# Altium PCB main.PcbDoc (part 1 of 2)
Units mm, origin at the board's own origin, x right, y up, seen from the top; angles counter-clockwise.
Board outline 39.94 x 40 mm, 2 copper layers (Top Layer, Bottom Layer), stack 1.571 mm thick; 56 components, 40 nets, 199 pads, 485 vias.
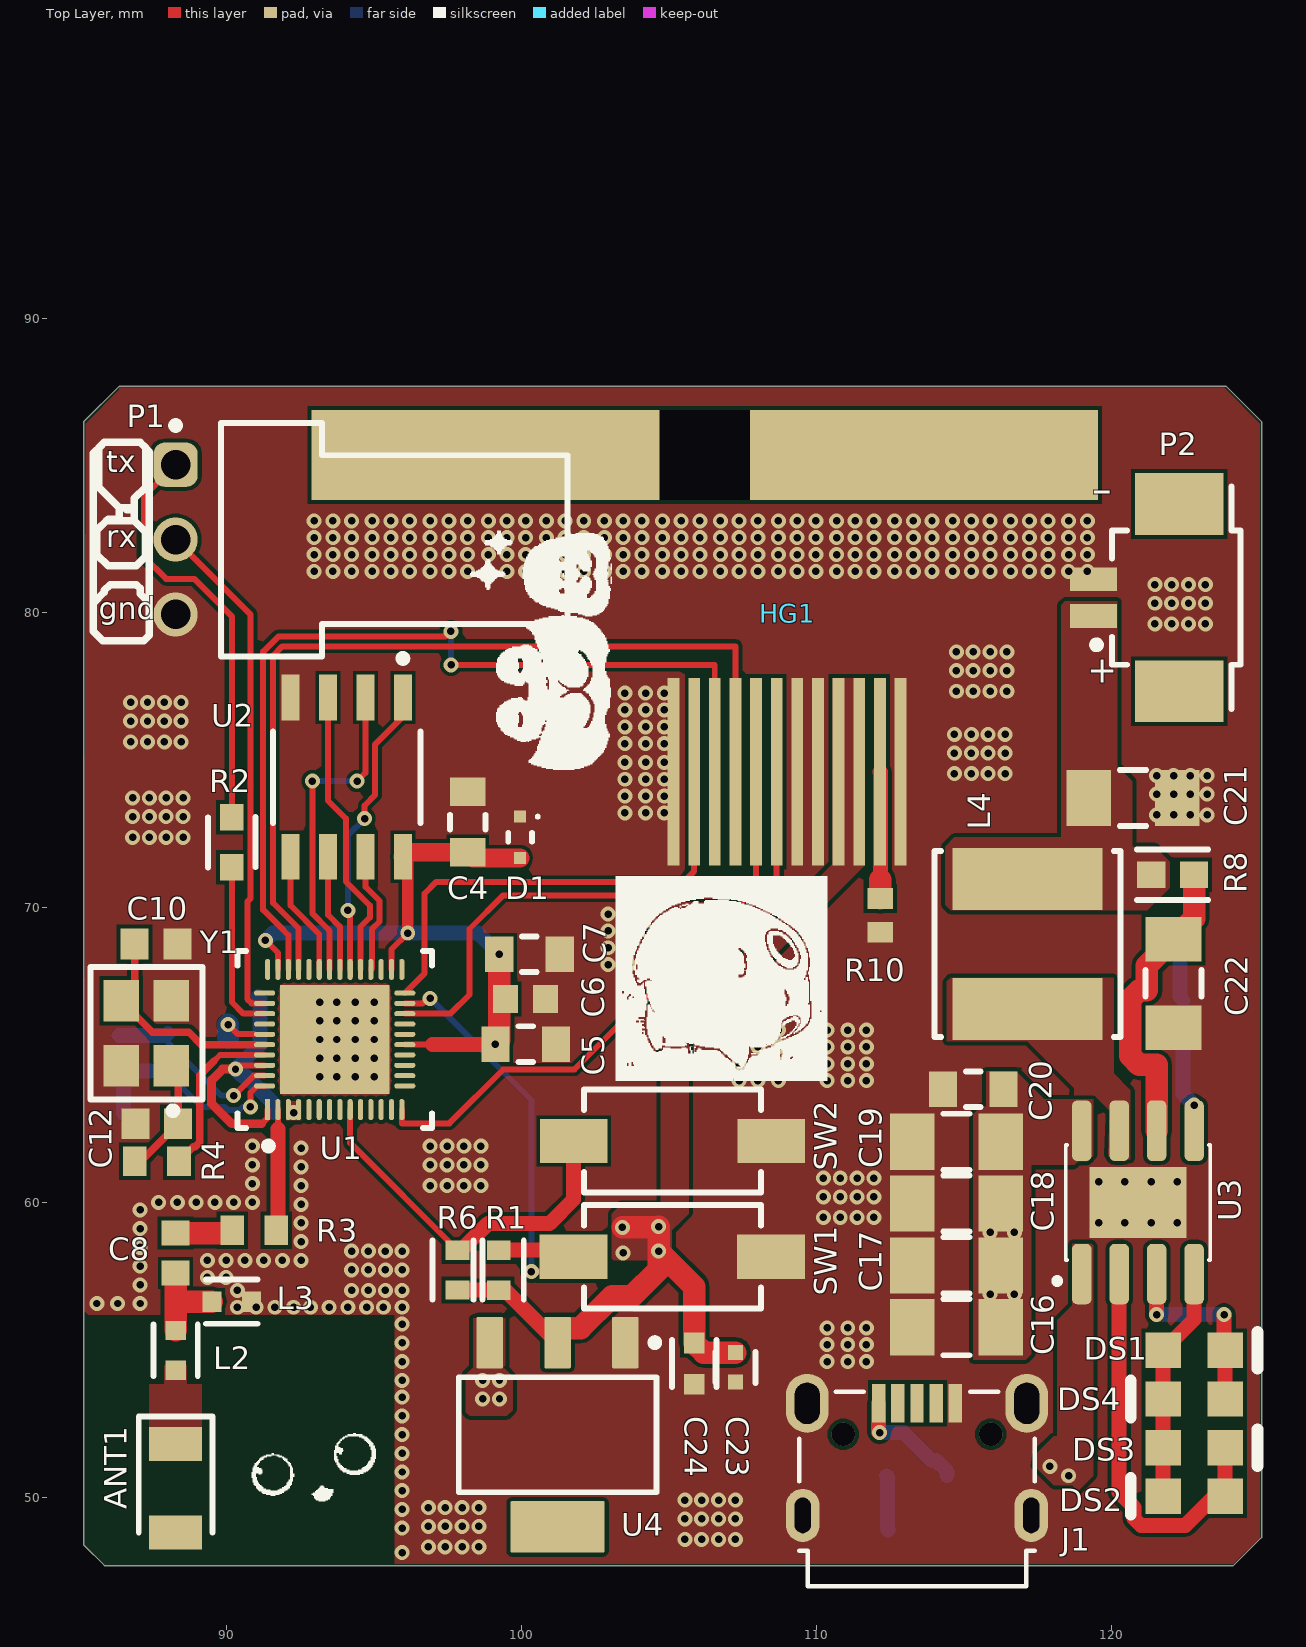
[diagram p0: Top Layer view]
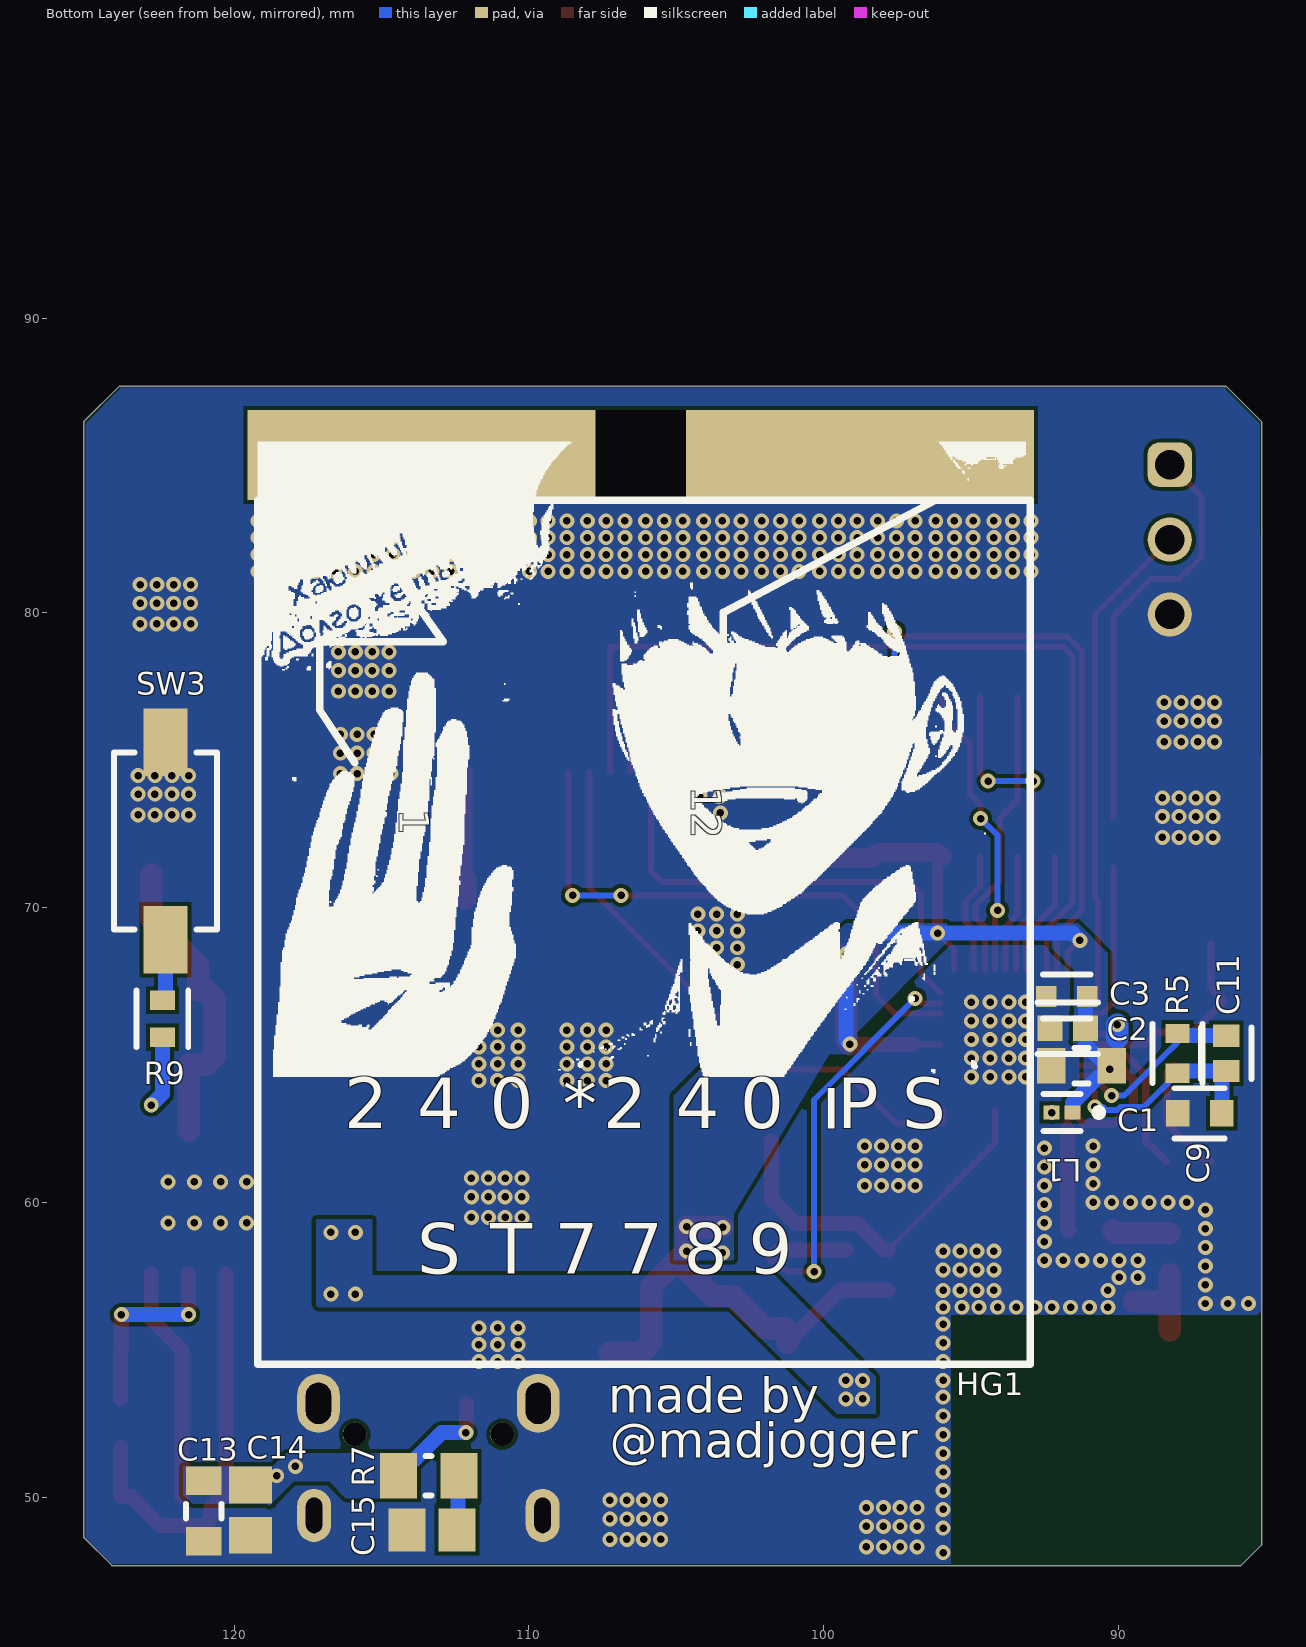
[diagram p1: Bottom Layer view, seen from below]
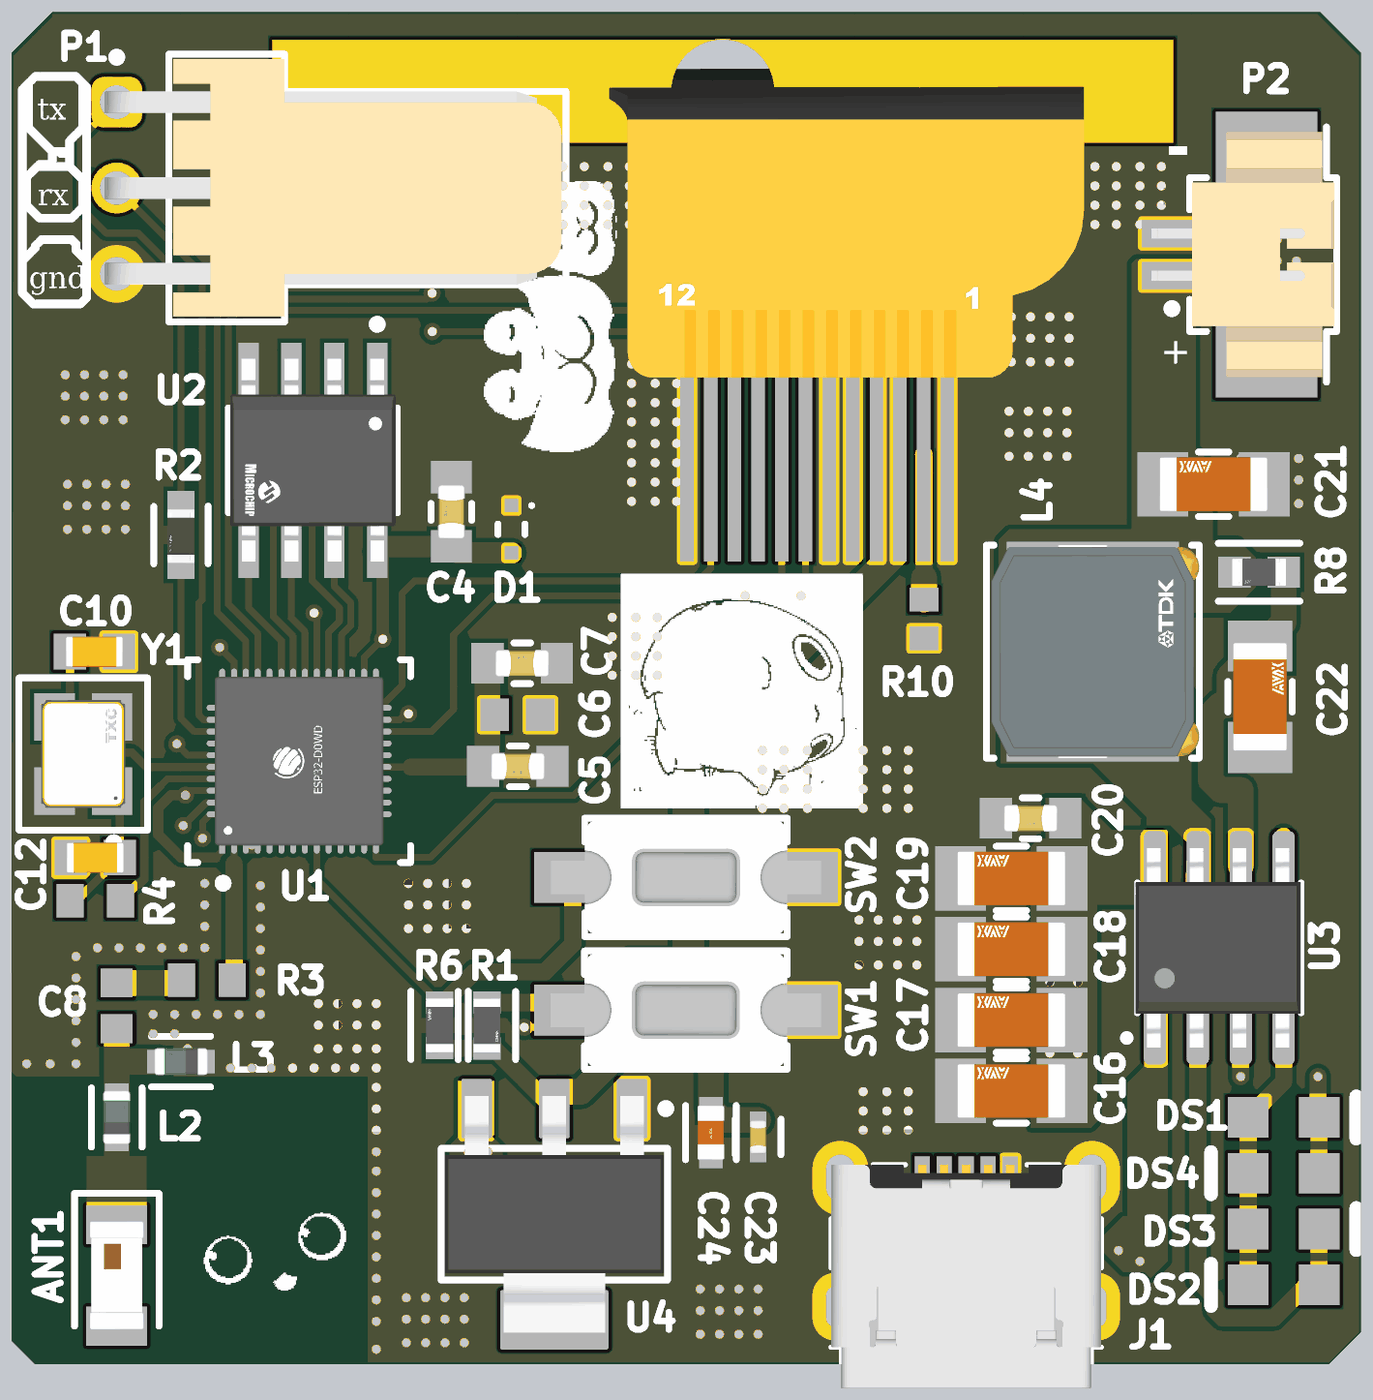
[diagram p2: 3D render of the assembled board from above, using the file's embedded part models]
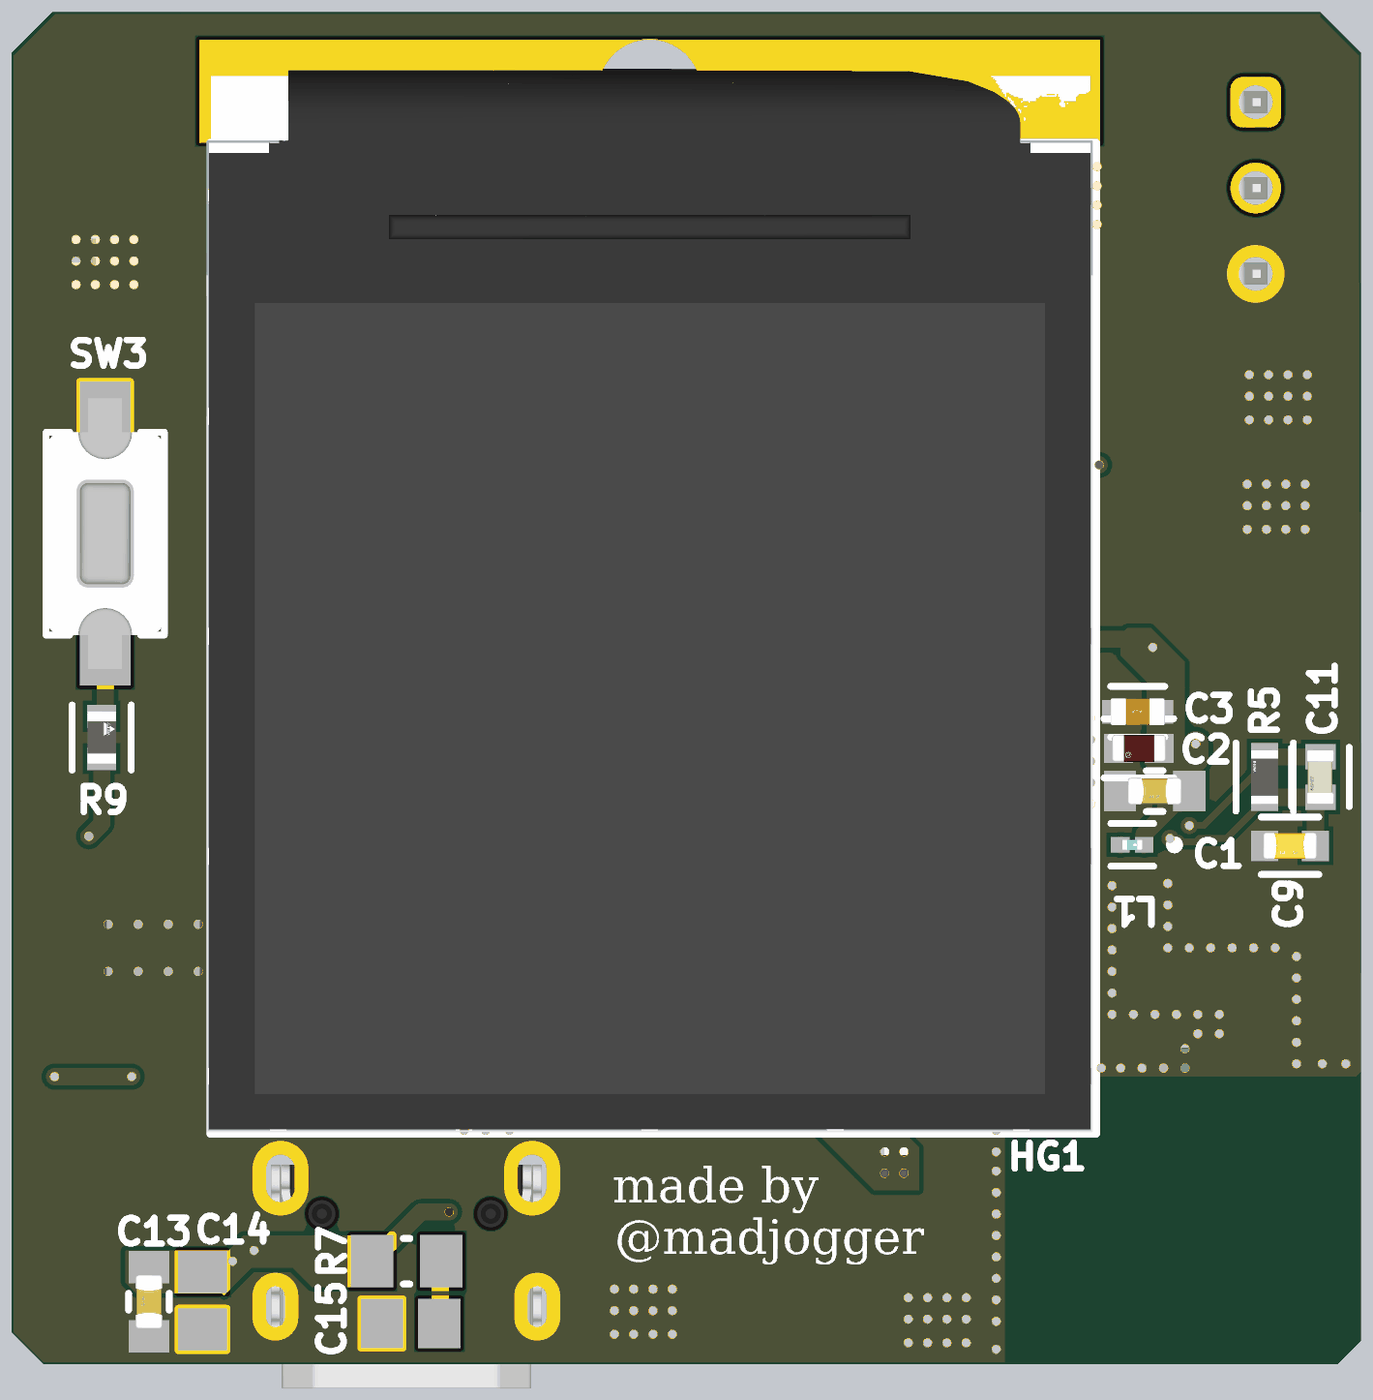
[diagram p3: 3D render of the assembled board from below, using the file's embedded part models]

## Layer stack, top to bottom
Top Solder: solder mask 0.0102, Solder Resist, Dk 3.5
Top Layer: signal copper 0.0356
Dielectric 1: dielectric 1.5, FR-4, Dk 4.8
Bottom Layer: signal copper 0.0356
Bottom Solder: solder mask 0.0102, Solder Resist, Dk 3.5

## Board outline
85.153,48.387 85.852,47.688 124.142,47.688 125.095,48.641 125.095,86.487 123.888,87.694 86.36,87.694 85.153,86.487

## Design rules (kind name [scope] priority, off if disabled: settings)
Clearance [All] p1: gap=0.127 ignorepadtopadclearanceinfootprint=TRUE
PlaneConnect [InNet('NetANT1_1')] p1: planeconnectstyle=Direct reliefexpansion=0.508 reliefentries=4 reliefconductorwidth=0.254 reliefairgap=0.254
PolygonConnect [All] p1: connectstyle=Direct reliefconductorwidth=0.254 reliefentries=4 polygonreliefangle="90 Angle" airgapwidth=0.254
RoutingVias [All] p1: holewidth=0.711 width=1.27 viastyle="Through Hole" minholewidth=0.711 minwidth=1.27 maxholewidth=0.711 maxwidth=1.27
SolderMaskExpansion [All] p1: expansion=0.102 istentingtop=FALSE
Width [All] p1: maxlimit=2.032 minlimit=0.203 preferedwidth=0.381
29 further rules are at their usual default settings.

## Classes and differential pairs
component class "power + display": C13 C14 C15 C16 C17 C18 C19 C20 C21 C22 C23 C24 DS1 DS2 DS3 DS4 HG1 HG*1 J1 L4 P2 R7 R8 R9 R10 SW3 U3 U4
component class esp32: ANT1 C1 C2 C3 C4 C5 C6 C7 C8 C9 C10 C11 C12 D1 L1 L2 L3 P1 R1 R2 R3 R4 R5 R6 SW1 SW2 U1 U2 Y1

## Components (designator, comment, footprint, x,y, rotation, side; value= is the part's Value field where it differs from the comment)
ANT1 "2450AT18B100E" ANTC3216X140N 88.265,50.316 r270 top
C1 "CGA3E2X7R1H104K080AA" FP-CGA3E-0_3-0_1-IPC_A 91.258,64.643 r0 bottom
C2 "UMK107AB7105KA-T" FP-0603-L_1_6_0_15-W_0_8-IPC_C 91.725,65.913 r0 bottom
C3 "C1608X5R1A106K080AC" FP-C1608-080-0_1-MFG 91.759,66.992 r180 bottom
C4 "CGA3E2X7R1H104K080AA" FP-CGA3E-0_3-0_1-IPC_A 98.171,72.907 r90 top
C5 "CGA3E2X7R1H104K080AA" FP-CGA3E-0_3-0_1-IPC_A 100.14,65.378 r180 top
C6 "1.2pF" CAPC1608X90X35NL10T15 100.131,66.902 r180 top
C7 "CGA3E2X7R1H104K080AA" FP-CGA3E-0_3-0_1-IPC_A 100.267,68.426 r0 top
C8 "1.2pF" CAPC1608X90X35NL10T15 88.265,58.293 r90 top
C9 "CC0603KRX7R9BB103" FP-CC0603-DA-MFG 87.251,63.028 r180 bottom value="10 nF"
C10 "GRM1885C1H220JA01D" CAPC1608X90X35ML10T15 87.604,68.77 r180 top
C11 "C0603C332J5GACTU" FP-C0603C-CF-MFG 86.353,65.06 r90 bottom value="3.3 nF"
C12 "GRM1885C1H220JA01D" CAPC1608X90X35ML10T15 87.63,62.674 r0 top
C13 "CGA3E2X7R1H104K080AA" FP-CGA3E-0_3-0_1-IPC_A 121.031,49.539 r90 bottom
C14 "10uF" CAPC2013X140X45NL15T25 119.443,49.569 r90 bottom
C15 "10uF" CAPC2013X140X45NL15T25 113.284,48.895 r180 bottom
C16 "12066C226KAT2A" FP-1206-L_3_2_0_2-W_1_6_0-IPC_A 114.748,55.776 r180 top
C17 "12066C226KAT2A" FP-1206-L_3_2_0_2-W_1_6_0-IPC_A 114.748,57.871 r180 top
C18 "12066C226KAT2A" FP-1206-L_3_2_0_2-W_1_6_0-IPC_A 114.748,59.967 r180 top
C19 "12066C226KAT2A" FP-1206-L_3_2_0_2-W_1_6_0-IPC_A 114.748,62.062 r180 top
C20 "CGA3E2X7R1H104K080AA" FP-CGA3E-0_3-0_1-IPC_A 115.319,63.84 r180 top
C21 "12066C226KAT2A" FP-1206-L_3_2_0_2-W_1_6_0-IPC_A 120.737,73.724 r180 top
C22 "12066C226KAT2A" FP-1206-L_3_2_0_2-W_1_6_0-IPC_A 122.111,67.437 r90 top
C23 "CC0402KRX7R9BB104" FP-CC0402-MFG 107.251,54.413 r270 top value="100 nF"
C24 "C1608X5R1A106K080AC" FP-C1608-080-0_1-MFG 105.855,54.54 r90 top
D1 "ESD5B5.0ST1G" ONSC-SOD-523-2-502-01_C_V 99.949,72.392 r270 top
DS1 "100%" AVAG-HSMX-C170_V 122.809,54.991 r0 top
DS2 "25%" AVAG-HSMX-C170_V 122.809,50.038 r180 top
DS3 "50%" AVAG-HSMX-C170_V 122.809,51.689 r0 top
DS4 "75%" AVAG-HSMX-C170_V 122.809,53.34 r180 top
HG1 "st7789 240*240" PCBComponent_1 108.746,78.497 r270 bottom
J1 "629105150521" 629105150521 113.411,50.292 r0 top
L1 "LQP03TN2N0B02D" FP-LQP03TG_02-IPC_A 91.921,63.055 r0 bottom
L2 "LQG18HN3N3S00D" FP-LQG18HH_00-MFG 88.265,54.991 r90 top
L3 "LQG18HN2N7S00D" FP-LQG18HH_00-MFG 90.17,56.642 r180 top
L4 "VLS6045EX-1R0N-H" FP-VLS6045EX-H-MFG 117.157,68.77 r90 top
P1 "61900319521" 61900319521 95.685,82.486 r90 top
P2 "653102131822" 653102131822 122.201,80.518 r90 top
R1 "RC0603FR-0710KL" FP-RC0603-0_55-IPC_C 99.224,57.71 r270 top
R2 "RT0603DRE07499RL" FP-RT0603-MFG 90.17,72.224 r270 top value=499Ω
R3 "RC0603JR-070RL" RESC1608X55X25ML10T15 90.932,59.055 r0 top
R4 "RC0603JR-070RL" RESC1608X55X25ML10T15 87.63,61.404 r180 top
R5 "RC0603FR-0720KL" FP-RC0603-0_55-IPC_C 88.001,65.06 r90 bottom
R6 "RC0603FR-0710KL" FP-RC0603-0_55-IPC_C 97.822,57.714 r90 top
R7 "2R" RESC2013X60X30ML20T20 113.402,50.736 r0 bottom
R8 "500mR" FP-CSR0603-IPC_B 122.082,71.12 r180 top
R9 "MCT06030C1002FP500" FP-MCT0603-IPC_C 122.428,66.23 r90 bottom
R10 "100R" RESC1609X50X30LL10T20 112.165,69.739 r90 top
SW1 "434111050826" WS-TASV_L6W3.5H5_4341x10508x6 105.114,58.165 r0 top
SW2 "434111050826" WS-TASV_L6W3.5H5_4341x10508x6 105.117,62.092 r180 top
SW3 "434111050826" WS-TASV_L6W3.5H5_4341x10508x6 122.326,72.263 r90 bottom
U1 "ESP32-D0WD" FP-ESP32-D0WD-IPC_C 93.662,65.532 r90 top
U2 "SST25WF080B-40I/SN" FP-C04-057-SN-MFG 94.07,74.43 r270 top
U3 "IP5306" SOIC9P127_490X600X170L84X42T330X241N 120.904,60.008 r90 top
U4 "LM1117IMP-3.3/NOPB" DCY0004A_N 101.219,52.127 r270 top
Y1 "7M-40.000MEEQ-T" FP-7M-MFG 87.274,65.743 r90 top

## Footprints (in the part's own frame and the unit in brackets; to place one, negate y for a bottom-side part, rotate by r counter-clockwise, add the part's x,y. Pads: shape width x height; smd on the part's side, far side on the other; paste and mask are expansions set on the pad)
61900319521 [mm] "2.54mm Male Right Angled Locking Header Top Locking, 3p"
  rrect50% 1.5x1.5 hole 1: 1(2.54,7.42)
  round 1.5 hole 1: 2(0,7.42) 3(-2.54,7.42)
  silkscreen extent -3.96,-5.87 3.99,7.54, body extent -3.81,-5.75 3.81,7.77, height 5.83
629105150521 [mm] "Micro USB 2.0 SMT Type B Horizontal 5 Contacts High Current"
  rect 0.45x1.3 smd: 1(-1.3,2.9) 2(-0.65,2.9) 3(0,2.9) 4(0.65,2.9) 5(1.3,2.9)
  round 0.8 hole 0.8 unplated: MH1(-2.5,1.85) MH2(2.5,1.85)
  oval 1.15x1.8 hole 0.55 slot 1.2 at 90 deg: Shell(-3.875,-0.9) Shell(3.875,-0.9)
  oval 1.45x2 hole 0.85 slot 1.4 at 90 deg: Shell(-3.725,2.9) Shell(3.725,2.9)
  silkscreen extent -4,-3.3 4,3.3, body extent -4,-3.3 4,3.3, height 2.75
653102131822 [mm] "1.25mm SMT Male Horizontal Shrouded Header, 2p"
  rect 0.81x1.6 smd: 1(-0.625,2.8) 2(0.625,2.8)
  rect 2.1x3 smd: MP1(-3.175,-0.1) MP2(3.175,-0.1)
  silkscreen extent -3.77,-2.17 3.77,2.82, body extent -3.63,-2.1 3.63,3.3, height 3.4
ANTC3216X140N [mm]
  rect 1.15x1.8 smd: 1(-1.5,0) 2(1.5,0)
  silkscreen extent -2.42,-1.25 1.5,1.25, body extent -1.6,-0.8 1.6,0.8, height 0.7
AVAG-HSMX-C170_V [mm] "SMD, 2-Leads, Body 2x1.25mm, Height 0.8mm"
  rect 1.2x1.2 smd: 1(-1.05,0) 2(1.05,0)
  silkscreen extent 2.15,-0.63 2.15,0.63, body extent -1,-0.63 1,0.63, height 0.8
CAPC1608X90X35ML10T15 [mm] "Chip Capacitor, 2-Leads, Body 1.7x0.9mm, IPC Low Density"
  rect 0.95x1.05 smd: 1(-0.725,0) 2(0.725,0)
  body extent -0.85,-0.45 0.85,0.45, height 0.9
CAPC1608X90X35NL10T15 [mm] "Chip Capacitor, 2-Leads, Body 1.60x0.80mm, IPC Medium Density"
  rect 0.85x0.95 smd: 1(-0.675,0) 2(0.675,0)
  body extent -0.85,-0.45 0.85,0.45, height 0.9
CAPC2013X140X45NL15T25 [mm] "Chip Capacitor, 2-Leads, Body 2.00x1.25mm, IPC Medium Density"
  rect 1.25x1.45 smd: 1(-0.85,0) 2(0.85,0)
  body extent -1.08,-0.7 1.07,0.7, height 1.4
DCY0004A_N [mm] "SOT223, 4-Leads, Body 6.7x3.7mm, Pitch 2.3mm, IPC Medium Density"
  rrect11% 1.75x0.9 smd: 1(-3.125,2.3) 2(-3.125,0) 3(-3.125,-2.3)
  rrect6% 1.75x3.2 smd: 4(3.125,0)
  silkscreen extent -3.25,-3.35 1.95,3.43, body extent -3.5,-3.25 3.5,3.25, height 1.62
FP-7M-MFG [mm]
  rect 1.4x1.2 smd paste+0 mask+0: 1(-1.1,-0.85) 2(1.1,-0.85) 3(1.1,0.85) 4(-1.1,0.85)
  silkscreen extent -2.75,-1.9 2.25,1.9, body extent -1.9,-1.55 1.9,1.55, height 0.25
FP-0603-L_1_6_0_15-W_0_8-IPC_C [mm]
  rect 0.858x0.862 smd paste+0 mask+0: 1(-0.602,0) 2(0.602,0)
  silkscreen extent -1.03,-0.87 1.03,0.87, body extent -0.8,-0.4 0.8,0.4, height 0.95
FP-1206-L_3_2_0_2-W_1_6_0-IPC_A [mm]
  rect 1.505x1.906 smd paste+0 mask+0: 1(-1.501,0) 2(1.501,0)
  silkscreen extent -0.45,-0.95 0.45,0.95, body extent -2.75,-1.45 2.75,1.45, height 0.25
FP-C04-057-SN-MFG [mm]
  rect 1.55x0.6 smd paste+0 mask+0: 1(-2.7,1.905) 2(-2.7,0.635) 3(-2.7,-0.635) 4(-2.7,-1.905) 5(2.7,-1.905) 6(2.7,-0.635) 7(2.7,0.635) 8(2.7,1.905)
  silkscreen extent -4.15,-2.5 1.55,2.5, body extent -3.57,-2.75 3.57,2.75, height 0.25
FP-C0603C-CF-MFG [mm]
  rect 0.75x0.9 smd paste+0 mask+0: 1(-0.6,0) 2(0.6,0)
  silkscreen extent -0.87,-0.85 0.88,0.85, body extent -0.8,-0.4 0.8,0.4, height 0.87
FP-C1608-080-0_1-MFG [mm]
  rect 0.7x0.7 smd paste+0 mask+0: 1(-0.7,0) 2(0.7,0)
  silkscreen extent -0.8,-0.75 0.8,0.75, body extent -0.8,-0.4 0.8,0.4, height 0.9
FP-CC0402-MFG [mm]
  rect 0.5x0.5 smd paste+0 mask+0: 1(-0.5,0) 2(0.5,0)
  silkscreen extent -0.53,-0.68 0.53,0.67, body extent -0.87,-0.48 0.87,0.48, height 0.25
FP-CC0603-DA-MFG [mm]
  rect 0.8x0.9 smd paste+0 mask+0: 1(-0.75,0) 2(0.75,0)
  silkscreen extent -0.85,-0.85 0.85,0.85, body extent -0.8,-0.4 0.8,0.4, height 0.9
FP-CGA3E-0_3-0_1-IPC_A [mm]
  rect 0.956x1.206 smd paste+0 mask+0: 1(-1.025,0) 2(1.025,0)
  silkscreen extent -0.25,-0.6 0.25,0.6, body extent -0.8,-0.4 0.8,0.4, height 1.1
FP-CSR0603-IPC_B [mm]
  rect 0.958x0.912 smd paste+0 mask+0: 1(-0.727,0) 2(0.727,0)
  silkscreen extent -1.21,-0.86 1.21,0.86, body extent -1.46,-0.71 1.46,0.71, height 0.25
FP-ESP32-D0WD-IPC_C [mm]
  rect 0.718x0.172 smd paste+0 mask+0: 1(-2.377,2.275)
  rrect100% 0.718x0.172 smd paste+0 mask+0: 2(-2.377,1.925) 3(-2.377,1.575) 4(-2.377,1.225) 5(-2.377,0.875) 6(-2.377,0.525) 7(-2.377,0.175) 8(-2.377,-0.175) 9(-2.377,-0.525) 10(-2.377,-0.875) 11(-2.377,-1.225) 12(-2.377,-1.575) 13(-2.377,-1.925) 14(-2.377,-2.275) 25(2.377,-2.275) 26(2.377,-1.925) 27(2.377,-1.575) 28(2.377,-1.225) 29(2.377,-0.875) 30(2.377,-0.525) 31(2.377,-0.175) 32(2.377,0.175) 33(2.377,0.525) 34(2.377,0.875) 35(2.377,1.225) 36(2.377,1.575) 37(2.377,1.925) 38(2.377,2.275)
  rrect100% 0.172x0.718 smd paste+0 mask+0: 15(-1.575,-2.377) 16(-1.225,-2.377) 17(-0.875,-2.377) 18(-0.525,-2.377) 19(-0.175,-2.377) 20(0.175,-2.377) 21(0.525,-2.377) 22(0.875,-2.377) 23(1.225,-2.377) 24(1.575,-2.377) 39(1.575,2.377) 40(1.225,2.377) 41(0.875,2.377) 42(0.525,2.377) 43(0.175,2.377) 44(-0.175,2.377) 45(-0.525,2.377) 46(-0.875,2.377) 47(-1.225,2.377) 48(-1.575,2.377)
  rect 3.7x3.7 smd paste-1000 mask+0: 49(0,0)
  silkscreen extent -3.74,-3.3 3,3.3, body extent -2.84,-2.84 2.84,2.84, height 0.25
FP-LQG18HH_00-MFG [mm]
  rect 0.65x0.7 smd paste+0 mask+0: 1(-0.675,0) 2(0.675,0)
  silkscreen extent -0.87,-0.75 0.87,0.75, body extent -1.1,-0.58 1.1,0.58, height 0.25
FP-LQP03TG_02-IPC_A [mm]
  rect 0.554x0.463 smd paste+0 mask+0: 1(-0.354,0) 2(0.354,0)
  silkscreen extent -1.37,-0.63 0.63,0.63, body extent -0.3,-0.15 0.3,0.15, height 0.33
FP-MCT0603-IPC_C [mm]
  rect 0.664x0.862 smd paste+0 mask+0: 1(-0.629,0) 2(0.629,0)
  silkscreen extent -0.96,-0.87 0.96,0.87, body extent -0.77,-0.43 0.77,0.43, height 0.55
FP-RC0603-0_55-IPC_C [mm]
  rect 0.659x0.812 smd paste+0 mask+0: 1(-0.677,0) 2(0.677,0)
  silkscreen extent -1.01,-0.85 1.01,0.85, body extent -1.11,-0.55 1.11,0.55, height 0.25
FP-RT0603-MFG [mm]
  rect 0.9x0.8 smd paste+0 mask+0: 1(-0.85,0) 2(0.85,0)
  silkscreen extent -0.85,-0.81 0.86,0.8, body extent -1.4,-0.55 1.4,0.55, height 0.25
FP-VLS6045EX-H-MFG [mm]
  rect 2.1x5.1 smd paste+0 mask+0: 1(-2.2,0) 2(2.2,0)
  silkscreen extent -3.15,-3.15 3.15,3.15, body extent -3.35,-3.25 3.35,3.25, height 0.25
ONSC-SOD-523-2-502-01_C_V [mm] "SOD, 2-Leads, Body 1.2x0.8mm"
  rect 0.4x0.4 smd: 1(-0.7,0) 2(0.7,0)
  silkscreen extent -0.75,-0.4 0.15,0.65, body extent -0.6,-0.4 0.6,0.4, height 0.7
PCBComponent_1 [mm]
  rect 6.353x0.4 smd far side paste+0 mask+0.102: 1(3.884,-4.106) 2(3.884,-3.405) 3(3.884,-2.707) 4(3.884,-2.006) 5(3.884,-1.306) 6(3.884,-0.606) 7(3.884,0.093) 8(3.884,0.794) 9(3.884,1.495) 10(3.884,2.195) 11(3.884,2.894) 12(3.884,3.594)
  rect 3.048x26.67 hole 3.048 square: 4(-6.858,2.54)
  silkscreen extent -5.32,-10.46 23.98,15.74, body extent -7.52,-10.58 23.94,15.66, height 1.43
RESC1608X55X25ML10T15 [mm] "Chip Resistor, 2-Leads, Body 1.60x0.80mm, IPC Low Density"
  rect 0.8x1 smd: 1(-0.75,0) 2(0.75,0)
  body extent -0.85,-0.45 0.85,0.45, height 0.55
RESC1609X50X30LL10T20 [mm] "Chip Resistor, 2-Leads, Body 1.55x0.85mm, IPC High Density"
  rect 0.7x0.85 smd: 1(-0.575,0) 2(0.575,0)
  body extent -0.82,-0.48 0.82,0.48, height 0.5
RESC2013X60X30ML20T20 [mm] "Chip Resistor, 2-Leads, Body 2.00x1.25mm, IPC Low Density"
  rect 1.25x1.55 smd: 1(-1.025,0) 2(1.025,0)
  silkscreen extent -0.1,-0.67 0.1,0.67, body extent -1.1,-0.72 1.1,0.72, height 0.6
SOIC9P127_490X600X170L84X42T330X241N [mm]
  rrect54% 2.05x0.66 smd: 1(-2.43,1.905) 2(-2.43,0.635) 3(-2.43,-0.635) 4(-2.43,-1.905) 5(2.43,-1.905) 6(2.43,-0.635) 7(2.43,0.635) 8(2.43,1.905)
  rect 2.41x3.3 smd paste-3: 9(0,0)
  silkscreen extent -2.77,-2.45 1.95,2.84, body extent -2.95,-2.41 2.95,2.49, height 1.5
WS-TASV_L6W3.5H5_4341x10508x6 [mm] "SMD Tact Switch, body 6x3.5mm"
  rect 2.3x1.5 smd: 1(-3.35,0) 2(3.35,0)
  silkscreen extent -3,-1.75 3,1.75, body extent -4,-1.75 4,1.75, height 5

## Part data
ANT1: "Antenna Chip -0.5dBi Gain 2500MHz 2-Pin CSMD T/R", Package=None, Check_prices=https://www.snapeda.com/parts/2450AT18B100E/AN/view-part/?ref=eda, MF=Johanson, MP=2450AT18B100E, SnapEDA_Link=https://www.snapeda.com/parts/2450AT18B100E/AN/view-part/?ref=snap
C1 C4 C5 C7 C13 C20: library part CMP-2000-07546-2, "Cap Ceramic 100nF 50V X7R 10% Pad SMD 0603 +125°C Automotive T/R", Capacitance=100nF, Case Code (Imperial)=0603, Case Code (Metric)=1608, Dielectric=X7R, Max Operating Temperature=125°C, Min Operating Temperature=-55°C, Package Quantity=1, Ratings=AEC-Q200, Tolerance=10%, Voltage=50V, Case/Package=0603, Composition=Ceramic, Depth=0.8mm, Height=0.8mm, Lead Free="Lead Free", Length=1.6mm, Mount="Surface Mount", Packaging="Tape and Reel", Radiation Hardening=No, REACH SVHC="No SVHC", Termination=SMD/SMT, Thickness=0.035inch, Voltage Rating=50V, Voltage Rating (DC)=50V, Weight=7.1E-05oz, Width=0.8mm
C2: library part CMP-2000-07531-4, "Ceramic Capacitor General Use 1uF ±10% 50V X7R 0603", Capacitance=1uF, Case Code (Imperial)=0603, Case Code (Metric)=1608, Dielectric=X7R, Max Operating Temperature=125°C, Min Operating Temperature=-55°C, Package Quantity=1, Tolerance=10%, Voltage Rating=50V, Case/Package=0603, Construction=Flat, Depth=0.8mm, Halogen Free="Halogen Free", Height=0.8mm, Length=1.6mm, Mount="Surface Mount", Packaging="Tape and Reel", Radiation Hardening=No, RoHS Compliant=Yes, Series=M, Termination=SMD/SMT, Thickness=0.037inch, Voltage Rating (DC)=50V, Width=0.031inch
C3 C24: library part CMP-2000-04979-3, "Multilayer Ceramic Capacitors 10μF ±10% 10V X5R SMD 0603", Capacitance=10uF, Case Code (Imperial)=0603, Case Code (Metric)=1608, Dielectric=X5R, Dielectric Material=Ceramic, Max Operating Temperature=85°C, Min Operating Temperature=-55°C, Package Quantity=1, Tolerance=10%, Voltage=10V, Case/Package=0603, Construction=Flat, Depth=0.8mm, Height=0.8mm, Lead Free="Lead Free", Length=1.6mm, Mount="Surface Mount", Number of Pins=2, Packaging="Tape and Reel", Radiation Hardening=No, REACH SVHC="No SVHC", Resistor Type=Ceramic, RoHS Compliant=Yes, Series=C, Termination=SMD/SMT, Thickness=0.035inch, Voltage Rating=10V, Voltage Rating (DC)=10V, Weight=7.1E-05oz, Width=0.8mm
C6 C8: library part CMP-2006-02438-1, Manufacturer=Murata, Part Number=GQM1885C2A1R2CB01D
C9: library part CMP-2100-03600-2, "CAP CER 10000PF 50V X7R 0603", Capacitance="10 nF", Manufacturer=YAGEO, Package=CC0603-DA, Temperature="-55°C to +125°C", Temperature Characteristic=X7R, Temperature Coefficient=15%, Temperature Range High=+125°C, Temperature Range Low=-55°C, Tolerance=0.1, Voltage="50 V", Automotive=No, Category=Cap, ComponentLink2Description=Datasheet, ComponentLink2URL=http://www.yageo.com/documents/recent/UPY-GPHC_X7R_6.3V-to-50V_18.pdf, Device Class L1="Passive Components", Device Class L2=Capacitors, Device Class L3="Ceramic Capacitors", Digikey Description="CAP CER 10000PF 50V X7R 0603", Footprint Url=http://www.yageo.com/exep/pages/download/literatures/UPY-C_GEN_24.pdf, Height=0.9mm, Lead Free=Yes, Manufacturer Part Number=CC0603KRX7R9BB103, Material=Ceramic, Mouser Description="Multilayer Ceramic Capacitor, CC Series, 0.01 - F, - 10%, X7R, 50 V, 0603 [1608 Metric]", Octopart=https://octopart.com/cc0603krx7r9bb103-yageo-192938, RoHS=TRUE, Voltage Rating="50 V"
C10 C12: library part CMP-2000-04945-1, "Chip Capacitor, 22 pF, +/- 5%, 50 V, -55 to 125 degC, 0603 (1608 Metric), RoHS, Tape and Reel", Capacitance=22pF, Case Size/Dimension=0603, Dielectric=C0G, Manufacturer=Murata, Package Description="2-Pin Surface Mount Device, Body 1.6 x 0.8 mm", Package Reference=603, Rated Voltage=50V, Tolerance (%)=±5%, Datasheet URL=https://datasheet.ciiva.com/11786/0900766b807a1cab-11786398.pdf, Datasheet Version=Jul-06, Manufacturer URL=http://www.murata.com/
C11: library part CMP-2006-03334-2, "CAP CER 3300PF 50V 5% NP0 0603", Capacitance="3,300 pF", Manufacturer=KEMET, Package=C0603C-CF, Temperature="-55°C to +125°C", Temperature Characteristic=C0G, Temperature Coefficient=30ppm/°C, Temperature Range High=+125°C, Temperature Range Low=-55°C, Tolerance=0.05, Voltage Rating="50 V", Automotive=Yes, Automotive Grade="Grade 1", Category=Cap, ComponentLink2Description=Datasheet, ComponentLink2URL=https://api.kemet.com/component-edge/download/datasheet/C0603C100J5GACAUTO.pdf, Device Class L1="Passive Components", Device Class L2=Capacitors, Device Class L3="Ceramic Capacitors", Digikey Description="CAP CER 3300PF 50V 5% NP0 0603", Height=0.87mm, Lead Free=Yes, Manufacturer Part Number=C0603C332J5GACTU, Material=Ceramic, Mouser Description="Multilayer Ceramic Capacitors MLCC - SMD/SMT 50volts 3300pF 5% C0G", Octopart=https://octopart.com/c0603c332j5gactu-kemet-12580539, RoHS=TRUE
C14 C15: library part CMP-2007-03395-1, Manufacturer=Murata, Part Number=GRM21BR71A106KE51L
C16 C17 C18 C19 C21 C22: library part CMP-1037-04985-3, "CAP CER 22UF 6.3V X7R 1206", Capacitance=22uF, Case Code (Imperial)=1206, Case Code (Metric)=3216, Dielectric=X7R, Max Operating Temperature=125°C, Min Operating Temperature=-55°C, Package Quantity=2500, Tolerance=10%, Voltage=6.3V, Case/Package=1206, Construction=Flat, Contact Plating=Tin, Depth=1.6mm, Dissipation Factor=5%, Height=1.78mm, Lead Free="Lead Free", Length=3.2mm, Mount="Surface Mount", Number of Pins=2, Packaging="Tape and Reel", Radiation Hardening=No, REACH SVHC="No SVHC", RoHS Compliant=Yes, Series=FlEXITERM, Termination=SMD/SMT, Thickness=0.07inch, Voltage Rating=6.3V, Voltage Rating (DC)=6.3V, Width=1.6mm
C23: library part CMP-03422-001010-1, "CAP CER 0.1UF 50V X7R 0402", Capacitance="100 nF", Manufacturer=YAGEO, Package=CC0402, Temperature="-55°C to +125°C", Temperature Characteristic=X7R, Temperature Coefficient=30ppm/°C, Temperature Range High=+125°C, Temperature Range Low=-55°C, Tolerance=0.1, Voltage Rating="50 V", Automotive=No, Automotive Grade=NA, Category=Cap, ComponentLink2Description=Datasheet, ComponentLink2URL=http://www.yageo.com/documents/recent/UPY-GP_NP0_16V-to-50V_16.pdf, Device Class L1="Passive Components", Device Class L2=Capacitors, Device Class L3="Ceramic Capacitors", Digikey Description="CAP CER 0.1UF 50V X7R 0402", Footprint Url=http://www.yageo.com/exep/pages/download/literatures/UPY-C_GEN_24.pdf, Height=0.55mm, Ipc Land Pattern Name=CAPC10050X50, Lead Free=Yes, Manufacturer Part Number=CC0402KRX7R9BB104, Material=Ceramic, Octopart=https://octopart.com/cc0402krx7r9bb104-yageo-56536067, RoHS=TRUE
D1: library part CMP-1063-00096-1, "Transient Voltage Suppressor, Micro-Packaged Diode for ESD Protection, 2-Pin SOD-523, Pb-Free, Tape and Reel", Manufacturer="On Semiconductor", ComponentLink1Description="Manufacturer URL", ComponentLink1URL=http://www.onsemi.com/, ComponentLink2Description=Datasheet, ComponentLink2URL=http://www.onsemi.cn/pub_link/Collateral/ESD5B5.0ST1G.PDF, ComponentLink3Description="Package Specification", ComponentLink3URL=http://www.onsemi.cn/pub_link/Collateral/ESD5B5.0ST1G.PDF, DatasheetVersion="Rev. 3", Direction=Bidirectional, IR Max (uA)=1, Mounting Technology="Surface Mount", Number of Lines=1, PackageDescription="2-Pin SOD, Body 1.2 x 0.8 mm", PackageReference=SOD-523-2-502-01_C, PackageVersion="Rev. C, 03/2007", Packing="Tape and Reel", PartNumber=ESD5B5.0ST1G, RoHS=Pb-Free, V(BR) Min (V)=5.8, VRWM Max (V)=5
DS1 DS2 DS3 DS4: library part CMP-2000-05062-1, "Chip LED, Green, 2.2 V, -40 to 85 degC, 2-Pin SMD, Pb-Free, Tape and Reel", Forward Current If=20mA, Forward Voltage=2.2V, Forward Voltage VF Max=2.6V, LED Colour=Green, Manufacturer=Avago, Operating Temperature Max=85degC, Operating Temperature Min=-30degC, Operating Temperature Range=-30degCto+85degC, Opto Case Style=SMD, Package Description="2-Pin Surface Mount Device, Body 2 x 1.25 mm, Height 0.8 mm", Package Reference=HSMX-C170, Storage Temperature Min=-40degC, Bulb Size=1.25mmx1.4mm, Datasheet URL=https://datasheet.ciiva.com/29280/180495-da-01-en-chip-led-hsmg-c170-gelb-gruen-29280971.pdf, Datasheet Version=Oct-08, Dominant Wavelength=572nm, Dominant Wavelength Typ=572nm, External Depth=0.8mm, External Length / Height=2mm, External Width=1.25mm, Forward Current If Max=20mA, LED Mounting=SMD, LED Type=Standard, Lens Shape=Rectangular, Light Area Height=1mm, Luminous Intensity=15mcd, Luminous Intensity Min=4mcd, Luminous Intensity Typ=15mcd, Manufacturer URL=http://www.avagotech.com/, Mounting Type=SMD, MSL=MSL2A-4weeks, No. of Pins=2, Opto Mounting Orientation=Top, Packaging=CutTape, Peak Forward Current=20mA, Peak Wavelength=570nm, PIV Max=5V, Storage Temperature Max=85degC, SVHC=NoSVHC(16-Jun-2014), Viewing Angle=170deg, Voltage Vf Typ=2.2V, Wavelength Typ=570nm
J1: library part CMP-1502-03252-3, Contact Resistance=30mΩ, Current Rating=3A, Insulation Resistance=1GΩ, Max Operating Temperature=85°C, Min Operating Temperature=-40°C, Operating Supply Voltage=30V, Connector Type=USB, Contact Material=Gold, Contact Plating=Gold, Features=Shielded, Gender=Receptacle, Height=2.86mm, Lead Free="Lead Free", Mount="Horizontal, Surface Mount", NexarPartId=52645113, Number of Contacts=5, Number of Pins=5, Orientation=Horizontal, Packaging="Tape and Reel", REACH SVHC=Unknown, RoHS=Compliant, Termination=SMD/SMT, USB Standard="USB 2.0", Voltage Rating=30V
L1: library part CMP-06042-013297-1, "Film type RF Inductor 2nH ±0.1nH 600mA 0.15Ω 0201 (0603)", Case Code (Imperial)=0201, Case Code (Metric)=0603, Current=400mA, Current Rating=600mA, DC Resistance (DCR)=150mR, Inductance=2nH, Max Operating Temperature=125°C, Min Operating Temperature=-55°C, Package Quantity=15000, Resistor Type="Thin Film", Self Resonant Frequency=12.5GHz, Test Frequency=500MHz, Case/Package=0201, Core Material=Non-Magnetic, DC Current=600mA, Depth=0.33mm, Height=0.3mm, Height - Seated (Max)=0.013inch, Length=0.6mm, Max DC Current=600mA, Military Standard=Not, Mount="Surface Mount", Packaging="Tape and Reel", Q Factor=14, REACH SVHC="No SVHC", Shielding=Unshielded, Termination=SMD/SMT, Width=0.012inch
L2: library part CMP-06042-009861-1, "Multilayer type RF Inductor 3.3nH ±0.3nH 0.12Ω 1000mA 0603", Case Code (Imperial)=0603, Case Code (Metric)=1608, Current Rating=500mA, DC Resistance (DCR)=150mR, Inductance=3.3nH, Max Operating Temperature=85°C, Min Operating Temperature=-55°C, Package Quantity=4000, Self Resonant Frequency=6GHz, Test Frequency=100MHz, Case/Package=0603, Core Material=Air, DC Current=500mA, Depth=0.95mm, Height=0.8mm, Height - Seated (Max)=0.037inch, Lead Free="Lead Free", Length=1.6mm, Max DC Current=500mA, Military Standard=Not, Mount="Surface Mount", Packaging="Tape and Reel", Q Factor=12, Radiation Hardening=No, REACH SVHC="No SVHC", Shielding=Unshielded, Termination=SMD/SMT, Width=0.8mm
L3: library part CMP-06042-013926-1, "Multilayer type RF Inductor 2.7nH ±0.3nH 0.12Ω 1000mA 0603", Case Code (Imperial)=0603, Case Code (Metric)=1608, Current Rating=500mA, DC Resistance (DCR)=150mR, Inductance=2.7nH, Max Operating Temperature=85°C, Min Operating Temperature=-55°C, Package Quantity=4000, Self Resonant Frequency=6GHz, Test Frequency=100MHz, Case/Package=0603, Core Material=Air, DC Current=500mA, Depth=0.95mm, Height=0.8mm, Height - Seated (Max)=0.037inch, Lead Free="Lead Free", Length=1.75mm, Max DC Current=500mA, Military Standard=Not, Mount="Surface Mount", Number of Pins=2, Packaging="Tape and Reel", Q Factor=12, Radiation Hardening=No, REACH SVHC="No SVHC", Shielding=Unshielded, Termination=SMD/SMT, Width=0.8mm
L4: library part CMP-08253-000044-1, "FIXED IND 1UH 6A 12MOHM SMD", RoHS Compliant=Yes
P1: library part CMP-1502-00600-2, Color=Beige, Contact Resistance=20mΩ, Current Rating=3A, Flammability Rating="UL94 V-0", Insulation Resistance=1GΩ, Max Operating Temperature=105°C, Min Operating Temperature=-40°C, Operating Supply Voltage=250V, Connector Type="Male Pin", Contact Gender=Male, Contact Material=Copper, Contact Mating Length=7.493mm, Contact Plating=Tin, Fastening Type=Friction, Gender=Male, Height=3.3mm, Housing Material=Nylon, Insulation=Insulated, Lead Free="Lead Free", Lead Pitch=2.54mm, Length=7.62mm, Mount="Through Hole", NexarPartId=18818224, Number of Contacts=3, Number of Pins=3, Number of Positions=3, Number of Rows=1, Packaging=Bulk, Pitch=2.54mm, REACH SVHC=Unknown, RoHS=Compliant, Termination="Through Hole", Voltage Rating=250V, Width=7.62mm
P2: library part CMP-1502-00771-2, Color="Beige, White", Contact Resistance=20mΩ, Current Rating=1A, Flammability Rating="UL94 V-0", Insulation Resistance=100MΩ, Max Operating Temperature=85°C, Min Operating Temperature=-40°C, Operating Supply Voltage=125V, Connector Type="Male Pin", Contact Gender=Male, Contact Material=Copper, Contact Mating Length=2.1336mm, Contact Plating=Tin, Gender=Male, Height=4.2mm, Housing Material=Nylon, Insulation=Insulated, Lead Pitch=1.25mm, Length=7.25mm, Mount="Surface Mount", NexarPartId=18818274, Number of Contacts=2, Number of Pins=2, Number of Positions=2, Number of Rows=1, Packaging="Tape and Reel", Pitch=1.25mm, REACH SVHC=Unknown, RoHS=Compliant, Termination=SMD/SMT, Voltage Rating=125V, Width=7.25mm
R1 R6: library part CMP-2100-03664-2, "RES 10K OHM 1% 1/10W 0603", Case Code (Imperial)=0603, Case Code (Metric)=1608, Max Operating Temperature=155°C, Max Power Dissipation=100mW, Min Operating Temperature=-55°C, Resistance=10kR, Resistance Tolerance=1%, Resistor Type="Thick Film", Temperature Coefficient=100ppm/°C, Voltage Rating=75V, Voltage Rating (DC)=50V, Case/Package=0603, Construction=Rectangular, Depth=0.8mm, Features="Moisture Resistant", Height=0.45mm, Lead Free="Lead Free", Lead Pitch=0.3mm, Length=1.6mm, Military Standard=Not, Number of Pins=2, Number of Terminations=2, Packaging="Tape and Reel", Power Rating=100mW, RoHS Compliant=Yes, Series=RC, Size Code=0603, Termination=SMD/SMT, Tolerance=1%, Weight=7.1E-05oz, Width=0.8mm
R2: library part CMP-03412-013051-1, "RES 499 OHM 1/10W .5% SMD 0603", Manufacturer=Yageo, Package=RT0603, Power Rating=0.1W, Resistance=499Ω, Temperature="-55°C to +155°C", Temperature Coefficient="50 ppm/°C", Temperature Range High=+155°C, Temperature Range Low=-55°C, Tolerance=0.005, Voltage Rating=75V, Automotive=No, Category=Res, ComponentLink2Description=Datasheet, ComponentLink2URL=http://www.yageo.com/documents/recent/PYu-RT_1-to-0.01_RoHS_L_9.pdf, Composition="Thin Film", Device Class L1="Passive Components", Device Class L2=Resistors, Device Class L3="Chip SMD Resistors", Digikey Description="RES 499 OHM 1/10W .5% SMD 0603", Footprint Url=http://www.yageo.com/exep/pages/download/literatures/PYu-R_Mount_10.pdf, Height=0.55mm, Ipc Land Pattern Name=RESC16080X45, Lead Free=Yes, Manufacturer Part Number=RT0603DRE07499RL, Octopart=https://octopart.com/rt0603dre07499rl-yageo-1226881, RoHS=TRUE, Series=RT
R3 R4: library part CMP-2100-03667-1, "Chip Resistor, 0 Ohm, +/- 5%, 0.1 W, -55 to 155 degC, 0603 (1608 Metric), RoHS, Tape and Reel", Case Code (Imperial)=0603, Case Code (Metric)=1608, Manufacturer=Yageo, Max Operating Temperature=155degC, Min Operating Temperature=-55degC, Package Description="2-Pin Surface Mount Device, Body 1.6 x 0.8 mm", Package Quantity=5000, Power Rating=100mW, Resistance=0mOhm, Temperature Coefficient=200ppm/degreesC, Tolerance=5%, Voltage Rating=50V, Case/Package=0603, Composition=ThickFilm, Contact Plating=Tin, Datasheet URL=http://www.yageo.com/NewPortal/yageodocoutput?fileName=/pdf/R-Chip/PYu-RC_Group_51_RoHS_L_5.pdf, Datasheet Version="Rev. 5, 10/2016", Depth=0.8mm, Height=0.45mm, Lead Free=LeadFree, Length=1.6mm, Manufacturer URL=http://www.yageo.com/, Military Standard=Not, Number of Pins=2, Package Reference=0603, Packaging=TapeandReel, Radiation Hardening=No, REACH SVHC=NoSVHC, RoHSCompliant=true, Termination=SMD/SMT, Voltage Rating (DC)=50V, Width=0.8mm
R5: library part CMP-2000-06932-2, "RES 20K OHM 1% 1/10W 0603", Case Code (Imperial)=0603, Case Code (Metric)=1608, Max Operating Temperature=155°C, Max Power Dissipation=100mW, Min Operating Temperature=-55°C, Package Quantity=1, Resistance=20kR, Resistance Tolerance=1%, Resistor Type="Thick Film", Temperature Coefficient=100ppm/°C, Voltage Rating=50V, Case/Package=0603, Construction=Rectangular, Depth=0.8mm, Features="Moisture Resistant", Height=0.022inch, Lead Free="Lead Free", Length=0.063inch, Military Standard=Not, Number of Pins=2, Number of Terminations=2, Packaging="Tape and Reel", Power Rating=100mW, REACH SVHC="No SVHC", RoHS Compliant=Yes, Series=RC, Size Code=0603, Technology="THICK FILM", Termination=SMD/SMT, Tolerance=1%, Voltage Rating (DC)=50V, Width=0.031inch
R7: library part CMP-2001-02290-1, Manufacturer="KOA Speer", Part Number=RK73H2ATTD2R00F
R8: library part CMP-26527-003904-1, "General Purpose Thick Film Chip Resistor, 0603, 0.5Ω, 5%, 300ppm/°C, 0.125W", Max Operating Temperature=155°C, Min Operating Temperature=-55°C, Tolerance=5%, Mount="Surface Mount", Packaging="Tape and Reel", RoHS Compliant=Yes
R9: library part CMP-02407-000418-1, "RES SMD 100 OHM 1% 1/8W 0603", Case Code (Imperial)=0603, Case Code (Metric)=1608, Max Operating Temperature=125°C, Max Power Dissipation=125mW, Min Operating Temperature=-55°C, Package Quantity=1, Power Rating=100mW, Resistance=10kR, Temperature Coefficient=50ppm/°C, Tolerance=1%, Voltage Rating=75V, Case/Package=0603, Composition="Thin Film", Contact Plating=Tin, Depth=0.85mm, Height=0.022inch, Lead Free="Lead Free", Length=1.55mm, Military Standard=Not, Mount="Surface Mount", Number of Terminations=2, Packaging="Tape and Reel", Radiation Hardening=No, Voltage Rating (DC)=75V, Width=0.8mm
R10: library part CMP-2000-03826-1, Manufacturer="Vishay Dale", Part Number=CRCW0603100RFKTA
SW1 SW2 SW3: library part CMP-1459-00003-2, Contact Current Rating=50mA, Contact Resistance=100mΩ, Insulation Resistance=100MΩ, Max Operating Temperature=85°C, Min Operating Temperature=-40°C, Operating Force=260N, Voltage Rating=12V, Actuator Length=1.5mm, Actuator Material="Liquid Crystal Polymer, Polymer", Contact Material="Stainless Steel, Steel", Contact Plating=Silver, Current Rating=50mA, Height=5mm, Illumination Type="Illuminated, Non-Illuminated", Length=8mm, Mechanical Life=30kcycles, Mount="Surface Mount", NexarPartId=23272333, Packaging="Tape and Reel", REACH SVHC="No SVHC", RoHS=Compliant, Switch Function=Off-Mom, Switch Travel=250µm, Termination=SMD/SMT, Throw Configuration=SPST, Width=3.5mm
U1: library part CMP-194065-000002-1, "IC RF TXRX+MCU BLUETOOTH 48VFQFN", Manufacturer=Espressif, Max Frequency=2484MHz, Max Supply Voltage=3.6V, Min Supply Voltage=1.8V, Nominal Supply Current=0.5A, Receiving Current=100mA, Temperature="-40°C to +125°C", Temperature Range High=+125°C, Temperature Range Low=-40°C, Transmitting Current=240mA, Automotive=No, Bandwidth=2412-2484MHz, Category=IC, ComponentLink2Description=Datasheet, ComponentLink2URL=https://www.espressif.com/sites/default/files/documentation/esp32_datasheet_en.pdf, Data Rate=150Mbits/s, Device Class L1="Integrated Circuits (ICs)", Device Class L2="RF Semiconductors and Devices", Device Class L3=Transceivers, Digikey Description="IC RF TXRX+MCU BLUETOOTH 48VFQFN", Height=0.9mm, Interface=I2C,SPI,UART,CAN,Ethernet,I2S,Other, Ipc Land Pattern Name=QFN35P500X500X85-48, Lead Free=Yes, Manufacturer Part Number=ESP32-D0WD, Mouser Description="SMD IC ESP32-D0WD, Dual Core Mcu, Wifi & Bluetooth Combo, QFN48-PIN, 5*5MM", Number Of Adc Channels=18, Number Of Gpio=34, Octopart=https://octopart.com/esp32-d0wd-espressif+systems-89169964, Package=ESP32-D0WD, RoHS=TRUE, Sensitivity=-70dBm, Standoff Height=0mm
U2: library part CMP-06315-000020-1, "IC FLASH 8MBIT SPI 40MHZ 8SOIC", Case/Package=SOIC, Frequency=40MHz, Max Operating Temperature=85°C, Max Supply Voltage=1.95V, Min Operating Temperature=-40°C, Min Supply Voltage=1.65V, Nominal Supply Current=4mA, Operating Supply Voltage=1.8V, Contact Plating=Tin, Density=8Mb, Height=1.5mm, Interface=SPI, Length=4.9mm, Max Frequency=40MHz, Memory Size=8Mb, Memory Type=FLASH, Mount="Surface Mount", Number of Pins=8, Packaging=Rail/Tube, Page Size=256B, Radiation Hardening=No, REACH SVHC="No SVHC", RoHS Compliant=Yes, Series=SST25, Supply Current=4mA, Width=3.9mm
U3: "RC (Pi) EMI Filter 2nd Order Low Pass 2 Channel R = 2.2kOhms, C = 1700pF 8-UFBGA, WLCSP", Package="UFBGA-8 NXP Semiconductors", Availability="Not in stock", Check_prices=https://www.snapeda.com/parts/IP5306/NXP%20Semiconductors/view-part/6618313/?ref=eda, MF="NXP USA Inc.", MP=IP5306, Price=None, SnapEDA_Link=https://www.snapeda.com/parts/IP5306/NXP%20Semiconductors/view-part/6618313/?ref=snap
U4: library part CMP-0062-01631-4, "800mA Low-Dropout Linear Regulator, 4-pin SOT-223, Pb-Free", Manufacturer="Texas Instruments", PackageTopMarking=XYTT*N05B, PowerWise=N, Code_IPC=SOT223-4, Code_JEDEC=TO-261-AA, ComponentLink1Description="Datasheet URL", ComponentLink1URL=http://www.ti.com/general/docs/lit/getliterature.tsp?genericPartNumber=LM1117-N&fileType=pdf, CompType="LDO IC", High-Reliability=Y, PackageDescription="Molded SOT-223, 6.50 x 3.56 x 1.6mm Body, 4 Lead, 2.3mm Pitch", PackageReference=DCY0004A, PartNumber=LM1117IMP-3.3/NOPB, PinCount=4, RoHS=Y
Y1: library part CMP-18717-000452-1, "Crystal 40MHz, 10ppm, 10pF, 50Ω", Case/Package=SMD/SMT, ESR (Equivalent Series Resistance)=60R, Frequency=40MHz, Frequency Stability=10ppm, Load Capacitance=10pF, Max Operating Temperature=70°C, Min Operating Temperature=-10°C, Package Quantity=1, Depth=2.5mm, Frequency Tolerance=10ppm, Height=0.031inch, Lead Free="Lead Free", Length=0.126inch, Mount="Surface Mount", Packaging="Tape and Reel", REACH SVHC="No SVHC", Series=7M, Termination=SMD/SMT, Tolerance=10ppm, Width=2.5mm

## Via types
v1: diameter 0.508, hole 0.254, Top Layer to Bottom Layer, tented both sides, 485 vias

## Nets (pads, with @x,y where several pads share a name; then routed paths per layer and width w, separated by ;. In a path a pad name is that pad's centre, name@x,y a point inside that pad or via, vN(x,y) a via of type N, cw(c..) or ccw(c..) an arc to the next point about the centre after c; other vN are vias at no path point)
"5V OUT": C16.1 C17.1 C18.1 C19.1 C20.1 U3.8 U4.3
  other v1: 98.679,53.34 99.251,53.34 98.679,53.975 99.251,53.975 115.887,56.896 116.713,56.896 115.887,58.991 116.713,58.991
+5_CHRG: C13.2 C14.2 J1.1 R7.2 U3.1 | length 4
  Top Layer w0.508: J1.1 112.111,52.227 v1(112.141,52.197)
  Bottom Layer w0.508: v1(112.141,52.197) 112.966,52.197 113.906,51.257 114.056,51.257 114.427,50.886 R7.2
  other v1: 118.554,50.736 117.919,51.054
BAT: C21.2 L4.2 P2.1 R8.2
DISP_CS: HG1.8 U1.14 | length 19.7
  Top Layer w0.203: U1.14 95.937,62.686 97.547,62.686 99.377,64.516 101.79,64.516 107.95,70.675 107.95,74.611 HG1.8
DISP_DC: HG1.7 U1.22 | length 19.7
  Top Layer w0.203: U1.22 97.585,66.407 98.234,67.056 98.234,69.278 99.377,70.421 v1(106.87,70.421) ; v1(108.521,70.421) 108.653,70.553 HG1.7
  Bottom Layer w0.203: v1(106.87,70.421) v1(108.521,70.421)
DISP_RST: HG1.11 U1.24 | length 16.5
  Top Layer w0.203: U1.24 96.71,67.778 96.71,70.485 97.091,70.866 104.645,70.866 105.474,70.866 105.852,71.245 105.852,72.633 HG1.11
DISP_SCK: HG1.9 U1.35 | length 31.1
  Top Layer w0.203: U1.35 92.438,69.297 91.567,70.168 91.567,78.549 91.885,78.867 107.251,78.867 HG1.9
DISP_SDA: HG1.10 U1.36 | length 31.5
  Top Layer w0.203: U1.36 92.087,69.076 91.796,69.367 91.694,69.469 91.237,69.926 91.237,78.686 91.748,79.197 97.422,79.197 v1(97.599,79.375) ; v1(97.607,78.24) 106.551,78.24 HG1.10
  Bottom Layer w0.203: v1(97.599,79.375) 97.599,78.247 v1(97.607,78.24)
GND: C1.2 C2.2 C3.1 C4.2 C5.1 C6.1 C7.2 C9.1 C10.1 C12.1 C13.1 C14.1 C15.1 C16.2 C17.2 C18.2 C19.2 C20.2 C21.1 C22.1 C23.2 C24.1 D1.1 HG1.1 HG1.5 HG1.6 HG1.12 J1.5 J1.Shell L3.1 P1.3 P2.2 R10.1 SW1.2 SW2.1 SW3.2 U1.49 U2.4 U3.9 U4.1 Y1.2 Y1.4
  other v1: 95.948,48.133 96.837,48.323 97.409,48.323 97.98,48.323 98.552,48.323 105.537,48.578 106.108,48.578 106.68,48.578 107.251,48.578 95.948,48.959 96.837,49.022 97.409,49.022 97.98,49.022 98.552,49.022 105.537,49.276 106.108,49.276 106.68,49.276 107.251,49.276 95.948,49.593 96.837,49.657 97.409,49.657 97.98,49.657 98.552,49.657 105.537,49.911 106.108,49.911 106.68,49.911 107.251,49.911 95.948,50.228 95.948,50.863 95.948,51.498 95.948,52.133 95.948,52.768 95.948,53.404 95.948,53.975 95.948,54.61 110.363,54.61 111.061,54.61 111.697,54.61 110.363,55.181 111.061,55.181 111.697,55.181 95.948,55.245 110.363,55.753 111.061,55.753 111.697,55.753 95.948,55.88 90.361,56.451 90.995,56.451 91.63,56.451 92.266,56.451 92.837,56.451 93.472,56.451 94.107,56.451 94.742,56.451 95.313,56.451 95.948,56.451 85.598,56.578 86.296,56.578 87.058,56.578 90.361,57.023 94.234,57.023 94.805,57.023 95.377,57.023 95.948,57.023 87.058,57.213 89.344,57.468 89.98,57.468 94.234,57.721 94.805,57.721 95.377,57.721 95.948,57.721 87.058,57.848 89.344,58.039 89.98,58.039 90.614,58.039 91.249,58.039 91.885,58.039 92.519,58.039 94.234,58.356 94.805,58.356 95.377,58.356 95.948,58.356 87.058,58.483 92.519,58.674 87.058,59.118 92.519,59.309 119.57,59.309 120.459,59.309 121.349,59.309 122.237,59.309 110.236,59.499 110.807,59.499 111.379,59.499 111.95,59.499 87.058,59.753 92.519,59.944 87.694,60.008 88.328,60.008 88.963,60.008 89.599,60.008 90.233,60.008 90.868,60.008 110.236,60.198 110.807,60.198 111.379,60.198 111.95,60.198 92.519,60.579 96.901,60.579 97.472,60.579 98.044,60.579 98.615,60.579 90.868,60.642 119.57,60.706 120.459,60.706 121.349,60.706 122.237,60.706 110.236,60.833 110.807,60.833 111.379,60.833 111.95,60.833 92.519,61.214 90.868,61.277 96.901,61.277 97.472,61.277 98.044,61.277 98.615,61.277 92.519,61.849 90.868,61.912 96.901,61.912 97.472,61.912 98.044,61.912 98.615,61.912 107.379,64.135 108.013,64.135 108.712,64.135 110.363,64.135 111.061,64.135 111.697,64.135 93.154,64.262 93.726,64.262 94.361,64.262 94.996,64.262 107.379,64.706 108.013,64.706 108.712,64.706 110.363,64.706 111.061,64.706 111.697,64.706 93.154,64.897 93.726,64.897 94.361,64.897 94.996,64.897 107.379,65.278 108.013,65.278 108.712,65.278 110.363,65.278 111.061,65.278 111.697,65.278 93.154,65.532 93.726,65.532 94.361,65.532 94.996,65.532 107.379,65.849 108.013,65.849 108.712,65.849 110.363,65.849 111.061,65.849 111.697,65.849 93.154,66.167 93.726,66.167 94.361,66.167 94.996,66.167 93.154,66.802 93.726,66.802 94.361,66.802 94.996,66.802 102.933,68.072 103.632,68.072 104.267,68.072 102.933,68.644 103.632,68.644 104.267,68.644 102.933,69.215 103.632,69.215 104.267,69.215 102.933,69.787 103.632,69.787 104.267,69.787 86.804,72.39 87.376,72.39 87.947,72.39 88.519,72.39 86.804,73.088 87.376,73.088 87.947,73.088 88.519,73.088 121.539,73.152 122.111,73.152 122.682,73.152 123.253,73.152 103.505,73.215 104.203,73.215 104.838,73.215 86.804,73.724 87.376,73.724 87.947,73.724 88.519,73.724 103.505,73.787 104.203,73.787 104.838,73.787 121.539,73.85 122.111,73.85 122.682,73.85 123.253,73.85 103.505,74.358 104.203,74.358 104.838,74.358 121.539,74.486 122.111,74.486 122.682,74.486 123.253,74.486 114.681,74.549 115.252,74.549 115.824,74.549 116.395,74.549 103.505,74.93 104.203,74.93 104.838,74.93 114.681,75.248 115.252,75.248 115.824,75.248 116.395,75.248 103.505,75.565 104.203,75.565 104.838,75.565 86.741,75.629 87.312,75.629 87.884,75.629 88.456,75.629 114.681,75.882 115.252,75.882 115.824,75.882 116.395,75.882 103.505,76.136 104.203,76.136 104.838,76.136 86.741,76.327 87.312,76.327 87.884,76.327 88.456,76.327 103.505,76.708 104.203,76.708 104.838,76.708 86.741,76.962 87.312,76.962 87.884,76.962 88.456,76.962 103.505,77.279 104.203,77.279 104.838,77.279 114.745,77.343 115.316,77.343 115.887,77.343 116.459,77.343 114.745,78.041 115.316,78.041 115.887,78.041 116.459,78.041 114.745,78.676 115.316,78.676 115.887,78.676 116.459,78.676 121.475,79.629 122.047,79.629 122.618,79.629 123.19,79.629 121.475,80.328 122.047,80.328 122.618,80.328 123.19,80.328 121.475,80.962 122.047,80.962 122.618,80.962 123.19,80.962 92.964,81.407 93.599,81.407 94.234,81.407 94.932,81.407 95.567,81.407 96.203,81.407 96.901,81.407 97.536,81.407 98.171,81.407 98.87,81.407 99.504,81.407 100.139,81.407 100.838,81.407 101.473,81.407 102.108,81.407 102.806,81.407 103.441,81.407 104.076,81.407 104.775,81.407 105.41,81.407 106.045,81.407 106.743,81.407 107.379,81.407 108.013,81.407 108.712,81.407 109.347,81.407 109.982,81.407 110.68,81.407 111.316,81.407 111.95,81.407 112.649,81.407 113.284,81.407 113.919,81.407 114.617,81.407 115.252,81.407 115.887,81.407 116.586,81.407 117.221,81.407 117.856,81.407 118.554,81.407 119.189,81.407 92.964,81.978 93.599,81.978 94.234,81.978 94.932,81.978 95.567,81.978 96.203,81.978 96.901,81.978 97.536,81.978 98.171,81.978 98.87,81.978 99.504,81.978 100.139,81.978 100.838,81.978 101.473,81.978 102.108,81.978 102.806,81.978 103.441,81.978 104.076,81.978 104.775,81.978 105.41,81.978 106.045,81.978 106.743,81.978 107.379,81.978 108.013,81.978 108.712,81.978 109.347,81.978 109.982,81.978 110.68,81.978 111.316,81.978 111.95,81.978 112.649,81.978 113.284,81.978 113.919,81.978 114.617,81.978 115.252,81.978 115.887,81.978 116.586,81.978 117.221,81.978 117.856,81.978 118.554,81.978 119.189,81.978 92.964,82.55 93.599,82.55 94.234,82.55 94.932,82.55 95.567,82.55 96.203,82.55 96.901,82.55 97.536,82.55 98.171,82.55 98.87,82.55 99.504,82.55 100.139,82.55 100.838,82.55 101.473,82.55 102.108,82.55 102.806,82.55 103.441,82.55 104.076,82.55 104.775,82.55 105.41,82.55 106.045,82.55 106.743,82.55 107.379,82.55 108.013,82.55 108.712,82.55 109.347,82.55 109.982,82.55 110.68,82.55 111.316,82.55 111.95,82.55 112.649,82.55 113.284,82.55 113.919,82.55 114.617,82.55 115.252,82.55 115.887,82.55 116.586,82.55 117.221,82.55 117.856,82.55 118.554,82.55 119.189,82.55 92.964,83.121 93.599,83.121 94.234,83.121 94.932,83.121 95.567,83.121 96.203,83.121 96.901,83.121 97.536,83.121 98.171,83.121 98.87,83.121 99.504,83.121 100.139,83.121 100.838,83.121 101.473,83.121 102.108,83.121 102.806,83.121 103.441,83.121 104.076,83.121 104.775,83.121 105.41,83.121 106.045,83.121 106.743,83.121 107.379,83.121 108.013,83.121 108.712,83.121 109.347,83.121 109.982,83.121 110.68,83.121 111.316,83.121 111.95,83.121 112.649,83.121 113.284,83.121 113.919,83.121 114.617,83.121 115.252,83.121 115.887,83.121 116.586,83.121 117.221,83.121 117.856,83.121 118.554,83.121 119.189,83.121
NetANT1_1: ANT1.1 L2.1
NetC8_1: C8.1 L2.2 L3.2 | length 3.1
  Top Layer w0.762: L2.2 88.265,56.616 ; C8.1@88.265,57.566 88.265,56.616 ; L3.2 88.291,56.642 88.265,56.616
NetC8_2: C8.2 R3.1 | length 2
  Top Layer w0.762: C8.2 90.095,58.968 R3.1
NetC9_2: C9.2 C11.1 R5.1 U1.48 | length 7.6
  Top Layer w0.203: v1(90.805,63.246) 90.805,63.732 91.03,63.957 U1.48
  Bottom Layer w0.203: R5.1 89.138,63.246 89.932,63.246 90.034,63.144 90.433,63.144 90.535,63.246 v1(90.805,63.246)
  Bottom Layer w0.508: C9.2 86.501,64.312 C11.1 87.924,64.46 R5.1
NetC10_2: C10.2 U1.44 Y1.3 | length 7.6
  Top Layer w0.254: C10.2 86.879,67.298 Y1.3 87.481,65.786 88.709,65.786 89.139,65.357 U1.44
NetC11_2: C11.2 R5.2 U1.47 | length 6.3
  Top Layer w0.203: v1(90.233,63.627) 90.914,64.307 U1.47
  Bottom Layer w0.203: R5.2 88.001,65.442 88.564,64.879 89.816,63.627 v1(90.233,63.627)
  Bottom Layer w0.508: C11.2 87.924,65.66 R5.2
NetC12_2: C12.2 R4.2 Y1.1 | length 4.1
  Top Layer w0.254: R4.2 87.085,61.404 C12.2 88.355,64.412 Y1.1
NetC15_2: C15.2 R7.1 | length 1.9
  Bottom Layer w0.508: R7.1 112.406,50.708 112.406,48.924 C15.2
NetC22_2: C22.2 R8.1 U3.6 | length 10.4
  Top Layer w0.762: U3.6 121.539,64.676 120.947,64.676 120.649,64.973 120.649,66.899 120.947,67.197 121.208,67.197 121.208,68.035 C22.2 122.809,69.636 R8.1
NetDS1_1: DS1.1 DS2.2 DS3.1 DS4.2 U3.4 | length 8
  Top Layer w0.508: DS2.2 DS3.1 DS4.2 DS1.1 122.809,56.041 U3.4
NetDS1_2: DS1.2 DS4.1 U3.3 | length 6.5
  Top Layer w0.508: v1(121.539,56.197) U3.3 ; v1(123.825,56.197) 123.825,55.025 DS1.2 DS4.1
  Bottom Layer w0.508: v1(121.539,56.197) v1(123.825,56.197)
NetDS2_1: DS2.1 DS3.2 U3.2 | length 13.7
  Top Layer w0.508: U3.2 120.269,50.165 120.778,49.656 120.778,49.28 121.001,49.057 122.517,49.057 123.498,50.038 DS2.1 DS3.2
NetHG1_2: HG1.2 R10.2 | length 4.3
  Top Layer w0.508: HG1.2 112.165,74.6 112.165,70.953
  Top Layer w0.762: R10.2 112.165,70.953
NetL1_2: L1.2 U1.3 U1.4
  other v1: 92.266,63.055
NetL4_1: L4.1 U3.7
NetP1_1: P1.1 R2.1 | length 14.2
  Top Layer w0.203: P1.1 87.185,83.947 87.185,81.915 87.947,81.153 88.9,81.153 90.17,79.883 R2.1
NetP1_2: P1.2 U1.40 | length 17.3
  Top Layer w0.203: P1.2 90.799,79.953 90.799,70.31 90.698,70.21 90.698,66.901 90.842,66.757 U1.40
NetR1_1: R1.1 SW1.1 U1.23 | length 15.9
  Top Layer w0.203: U1.23 96.647,66.757 96.819,66.929 v1(96.901,66.929) ; v1(100.33,57.658) 101.257,57.658 SW1.1
  Top Layer w0.508: R1.1 101.542,58.387 SW1.1
  Bottom Layer w0.203: v1(96.901,66.929) 98.632,65.198 98.632,65.178 100.33,63.48 v1(100.33,57.658)
NetR2_2: R2.2 U1.41 | length 5.9
  Top Layer w0.203: R2.2 90.17,66.802 90.565,66.407 U1.41
NetR3_2: R3.2 U1.2 | length 4.1
  Top Layer w0.203: 91.738,62.504 U1.2
  Top Layer w0.508: R3.2 91.738,59.111 91.738,62.504
NetR4_1: R4.1 U1.45 | length 5.7
  Top Layer w0.203: 89.557,64.792 89.772,65.007 U1.45
  Top Layer w0.254: R4.1 88.871,61.895 88.935,61.895 89.084,62.044 89.084,64.319 89.557,64.792
NetR6_2: R6.2 SW2.2 U1.9 | length 12.9
  Top Layer w0.203: U1.9 94.188,62.026 R6.2
  Top Layer w0.508: R6.2 97.954,58.391 98.859,59.296 100.952,59.296 101.767,60.111 SW2.2
NetR9_1: R9.1 U3.5 | length 2.4
  Bottom Layer w0.508: R9.1 122.428,63.691 v1(122.809,63.309)
NetR9_2: R9.2 SW3.1 | length 2.1
  Bottom Layer w0.508: SW3.1 122.326,66.962 R9.2
SD_CLK: U1.31 U2.6 | length 4
  Top Layer w0.203: U2.6 93.435,71.093 93.435,69.76 93.838,69.357 U1.31
SD_CMD: U1.30 U2.1 | length 10
  Top Layer w0.203: v1(94.107,69.913) 94.188,69.833 U1.30 ; v1(94.678,73.025) 94.678,73.469 95.036,73.827 95.036,74.439 95.036,75.541 95.975,76.481 U2.1
  Bottom Layer w0.203: v1(94.107,69.913) 94.107,72.453 v1(94.678,73.025)
SD_D0: U1.32 U2.2 | length 11.1
  Top Layer w0.203: v1(92.9,74.295) 92.9,69.809 93.468,69.242 93.468,69.219 93.487,69.2 U1.32 ; v1(94.424,74.295) 94.705,74.576 U2.2
  Bottom Layer w0.203: v1(92.9,74.295) v1(94.424,74.295)
SD_D1: U1.33 U2.5 | length 4.2
  Top Layer w0.203: U2.5 92.165,70.077 93.137,69.105 U1.33
SD_D2: U1.28 U2.7 | length 4.1
  Top Layer w0.203: U2.7 94.705,70.712 95.186,70.231 95.186,69.532 94.923,69.269 94.923,67.944 U1.28
SD_D3: U1.29 U2.3 | length 9.9
  Top Layer w0.203: U2.3 93.435,73.633 94.043,73.025 94.043,70.888 94.856,70.076 94.856,69.669 94.537,69.35 U1.29
VCC: C1.1 C2.1 C3.2 C4.1 C5.2 C6.2 C7.1 C23.1 C24.2 D1.2 HG1.3 HG1.4@110.752,74.612 L1.1 R1.2 R6.1 U1.1 U1.19 U1.26 U1.37 U1.43 U1.46 U2.8 U4.2 | length 55.4
  Top Layer w0.203: v1(90.043,66.04) 90.37,65.713 U1.43@90.932,65.713 ; v1(90.297,64.524) 90.43,64.657 U1.46 ; 91.186,62.674 91.388,62.876 U1.1 ; v1(91.313,68.897) 91.738,68.473 U1.37 ; U1.26 95.587,68.588 v1(96.139,69.139) ; U1.19 96.98,65.357
  Top Layer w0.305: v1(90.297,64.524) 89.864,64.524 89.49,64.151 89.49,63.354 90.17,62.674 91.186,62.674
  Top Layer w0.381: U2.8 96.139,71.567 v1(96.139,69.139)
  Top Layer w0.508: 96.98,65.357 99.094,65.357 v1(99.115,65.378) ; R6.1 99.22,57.038 R1.2 99.438,57.033 U4.2
  Top Layer w0.635: U2.8 96.127,71.882 C4.1 98.361,71.691 D1.2
  Top Layer w0.762: v1(99.115,65.378) 99.242,65.505 v1(99.242,68.426) ; U4.2 101.219,55.677 101.288,55.746 101.999,55.746 103.076,56.824 103.751,56.824 104.648,57.721 v1(104.648,58.356) ; v1(103.422,59.162) 104.628,59.162 v1(104.648,59.182) v1(104.648,58.356) ; C23.1 106.182,54.913 C24.2 105.855,57.15 v1(104.648,58.356)
  Bottom Layer w0.508: C3.2 91.123,66.929 C2.1 91.123,65.35 v1(90.297,64.524) 90.544,64.278 90.671,64.278 91.567,63.382 L1.1 ; v1(91.313,68.897) 91.555,69.139 v1(96.139,69.139) 98.528,69.139 v1(99.242,68.426) 99.242,65.505 v1(99.115,65.378)
  Bottom Layer w0.762: 90.043,65.596 v1(90.043,66.04)
  other v1: 103.441,58.293
pads on no net: ANT1.2 HG1.4@106.206,85.355 J1.2 J1.3 J1.4 J1.MH1 J1.MH2 P2.MP1 P2.MP2 U1.5 U1.6 U1.7 U1.8 U1.10 U1.11 U1.12 U1.13 U1.15 U1.16 U1.17 U1.18 U1.20 U1.21 U1.25 U1.27 U1.34 U1.38 U1.39 U1.42 U4.4